# Altium PCB Animated Archer Rev1.PcbDoc
Units mm, origin at the board's own origin, x right, y up, seen from the top; angles counter-clockwise.
Board outline 152.4 x 101.6 mm, 4 copper layers (Top Layer, Internal Plane 1, Internal Plane 2, Bottom Layer), stack 0.778 mm thick; 159 components, 185 nets, 906 pads, 12 vias.
Unrouted connection lines stored in the file: 319.
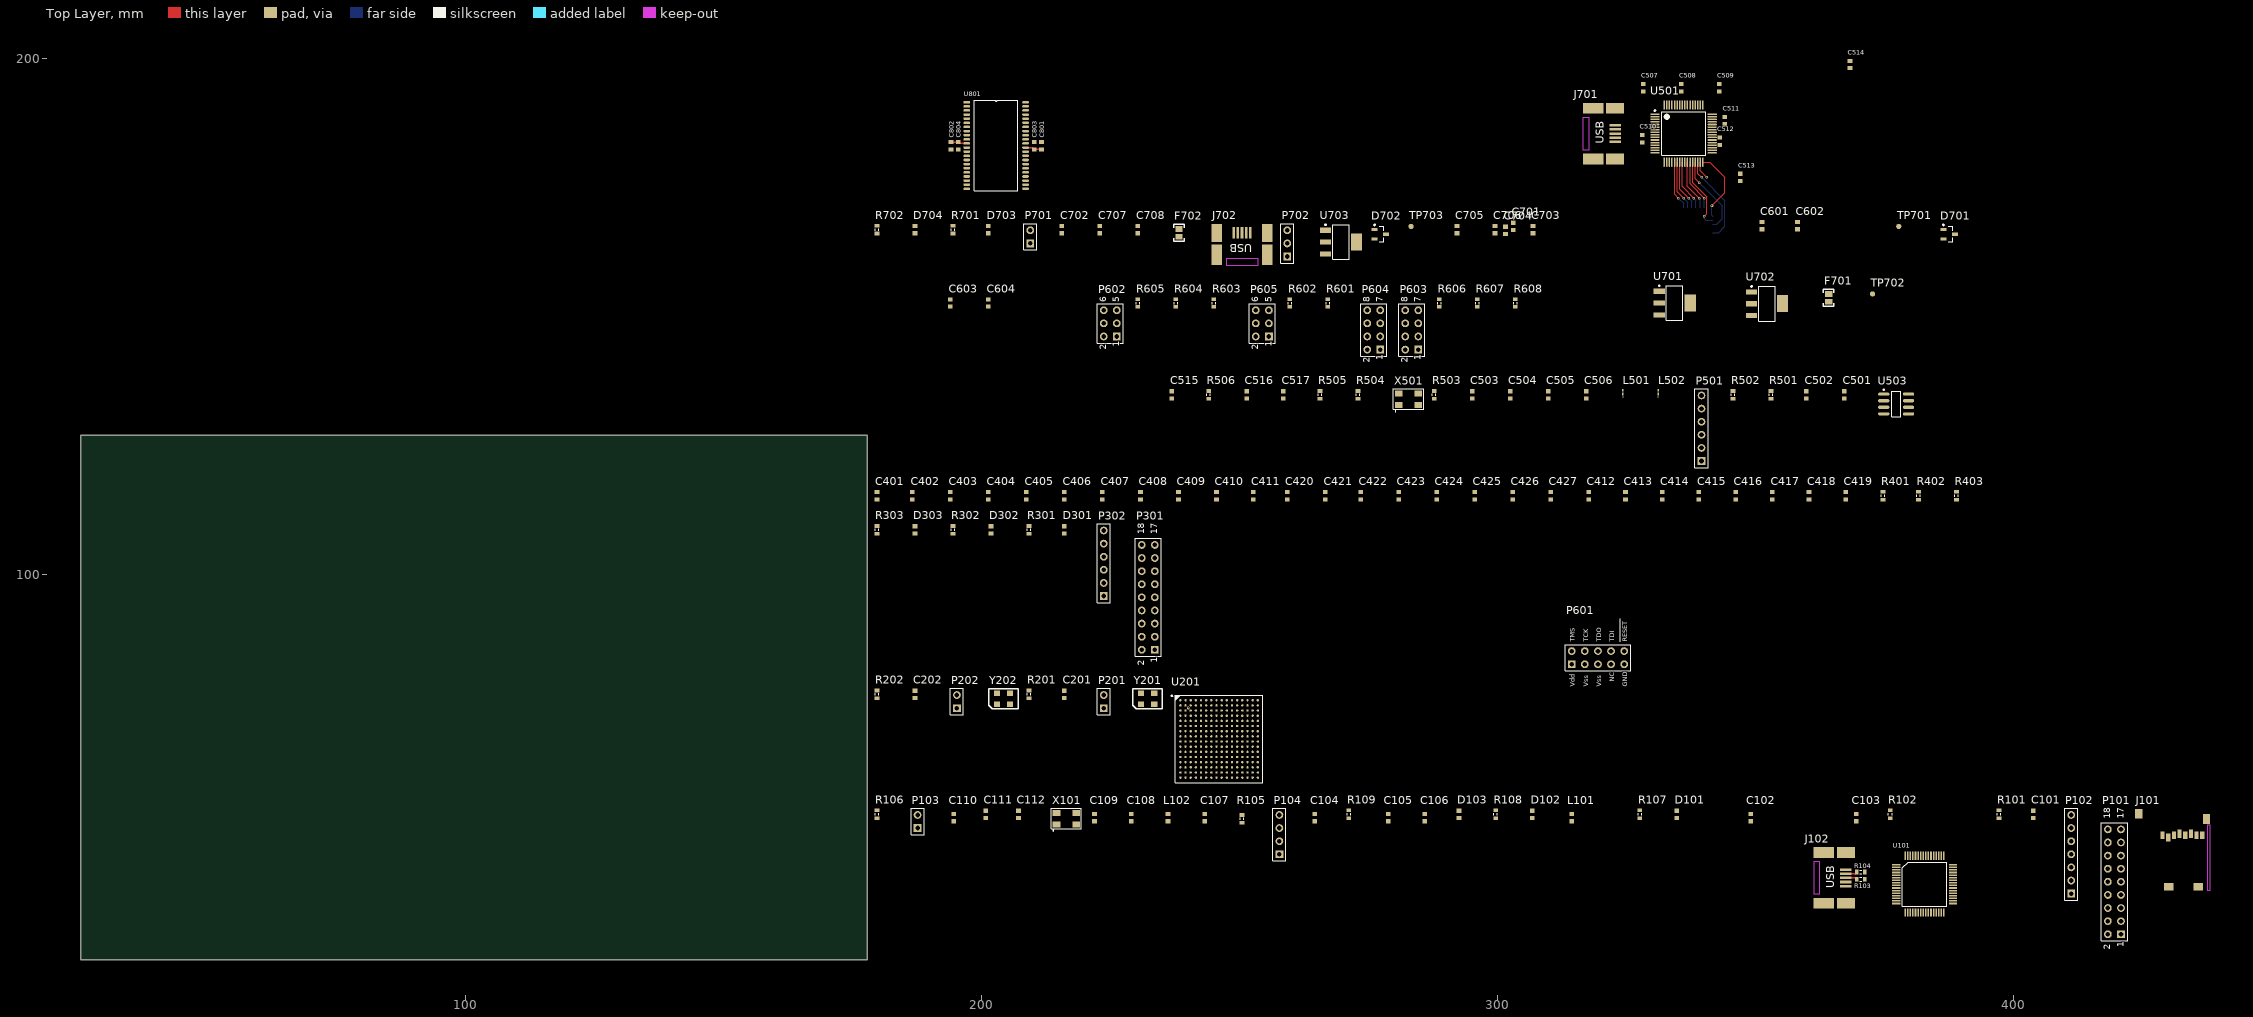
[diagram p0: Top Layer view]
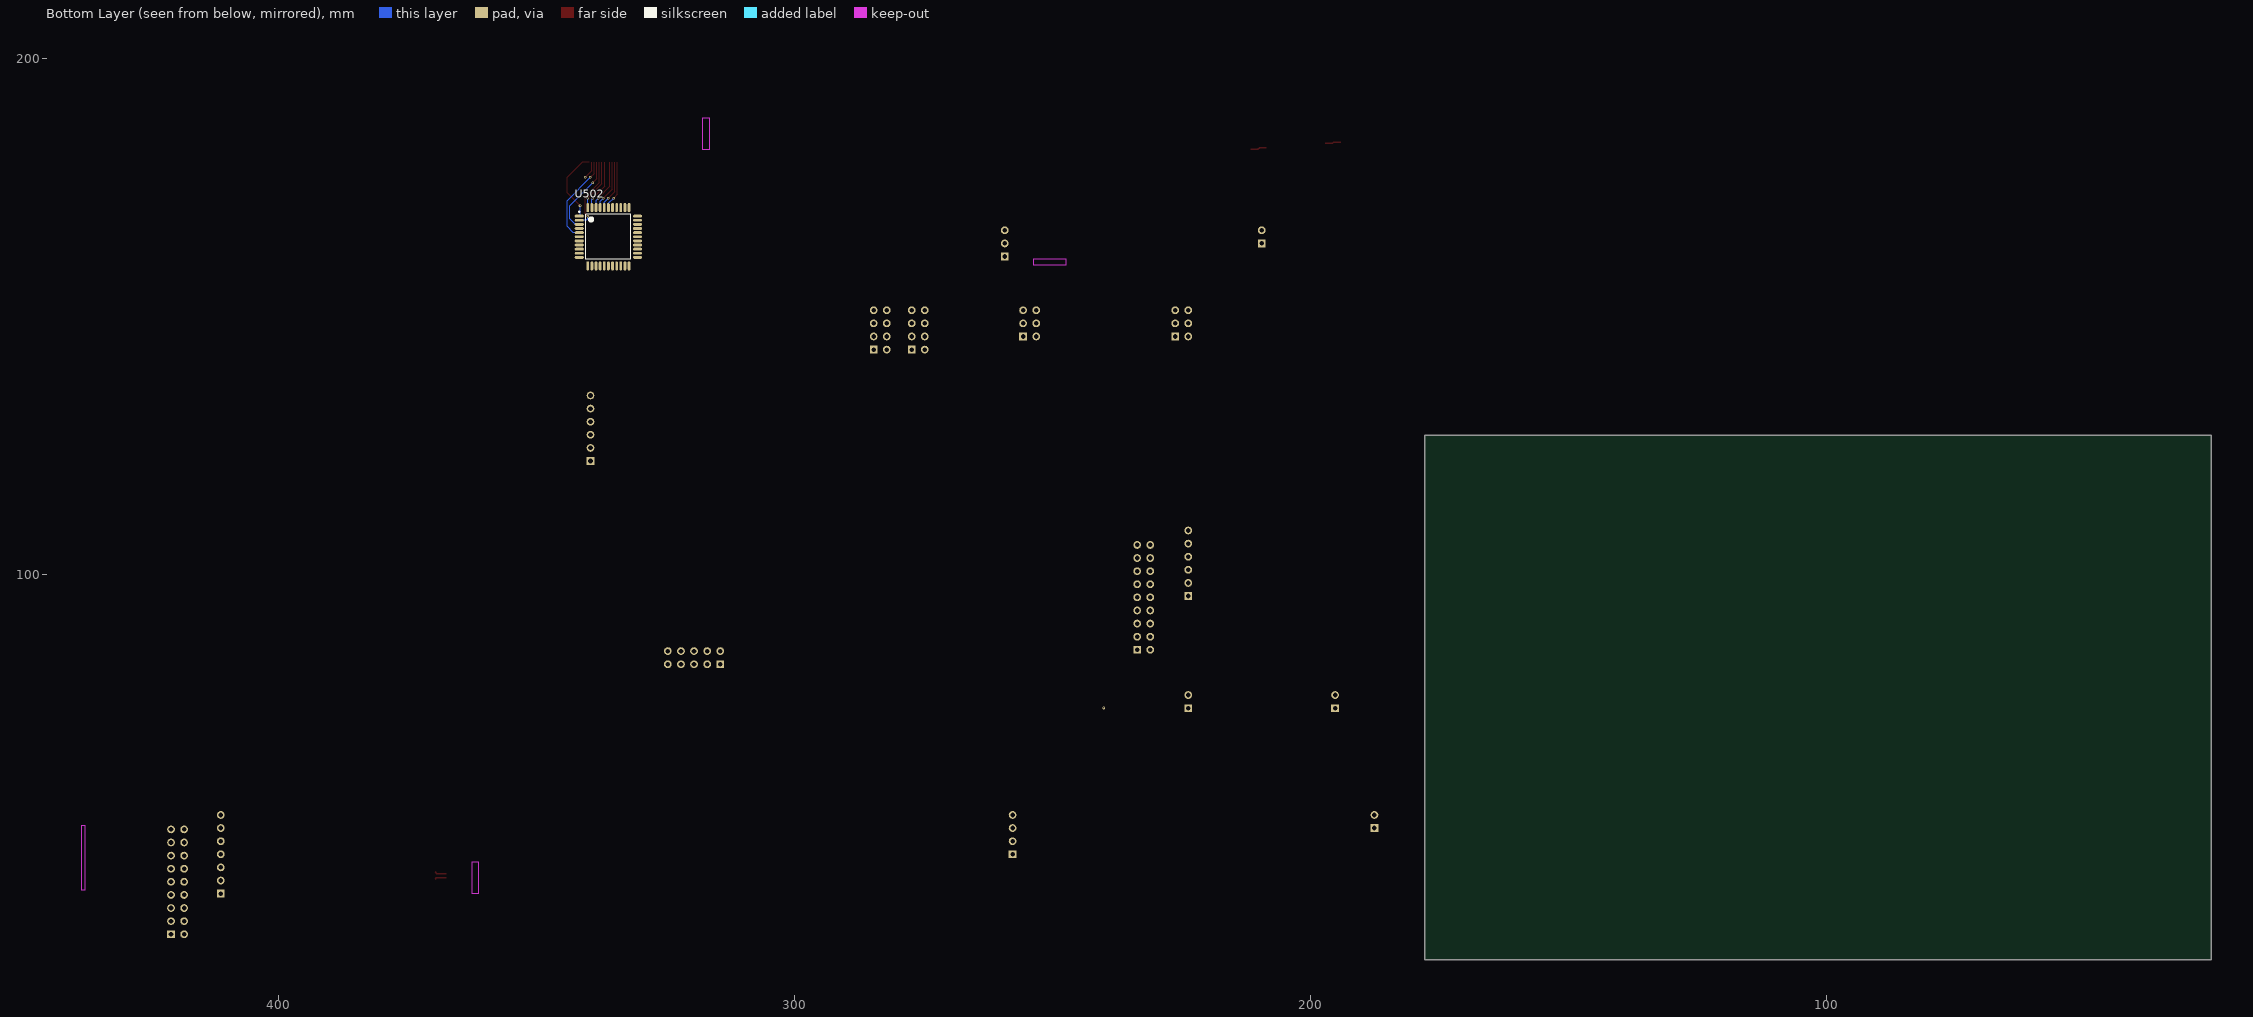
[diagram p1: Bottom Layer view, seen from below]
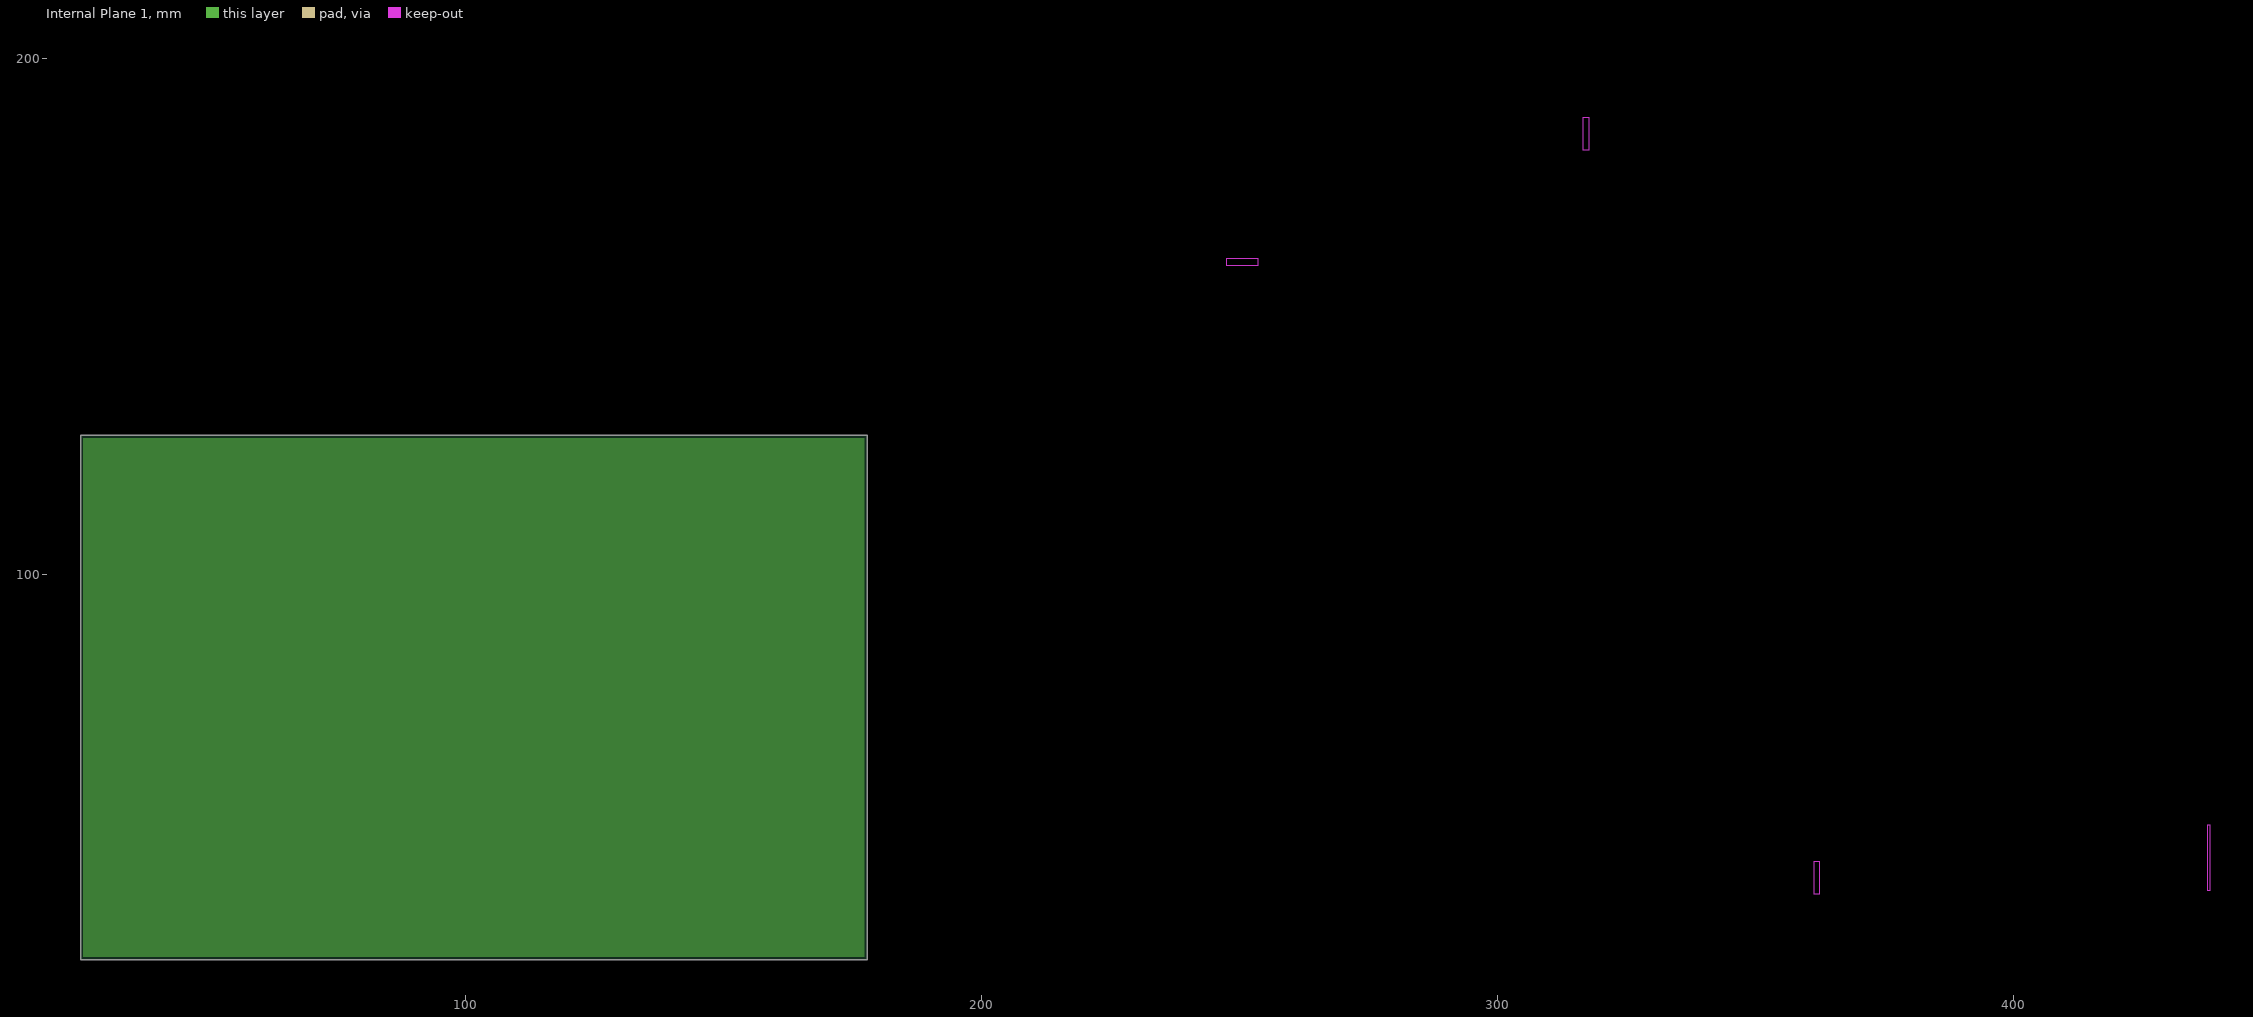
[diagram p2: Internal Plane 1, clearances drawn from the general rule]
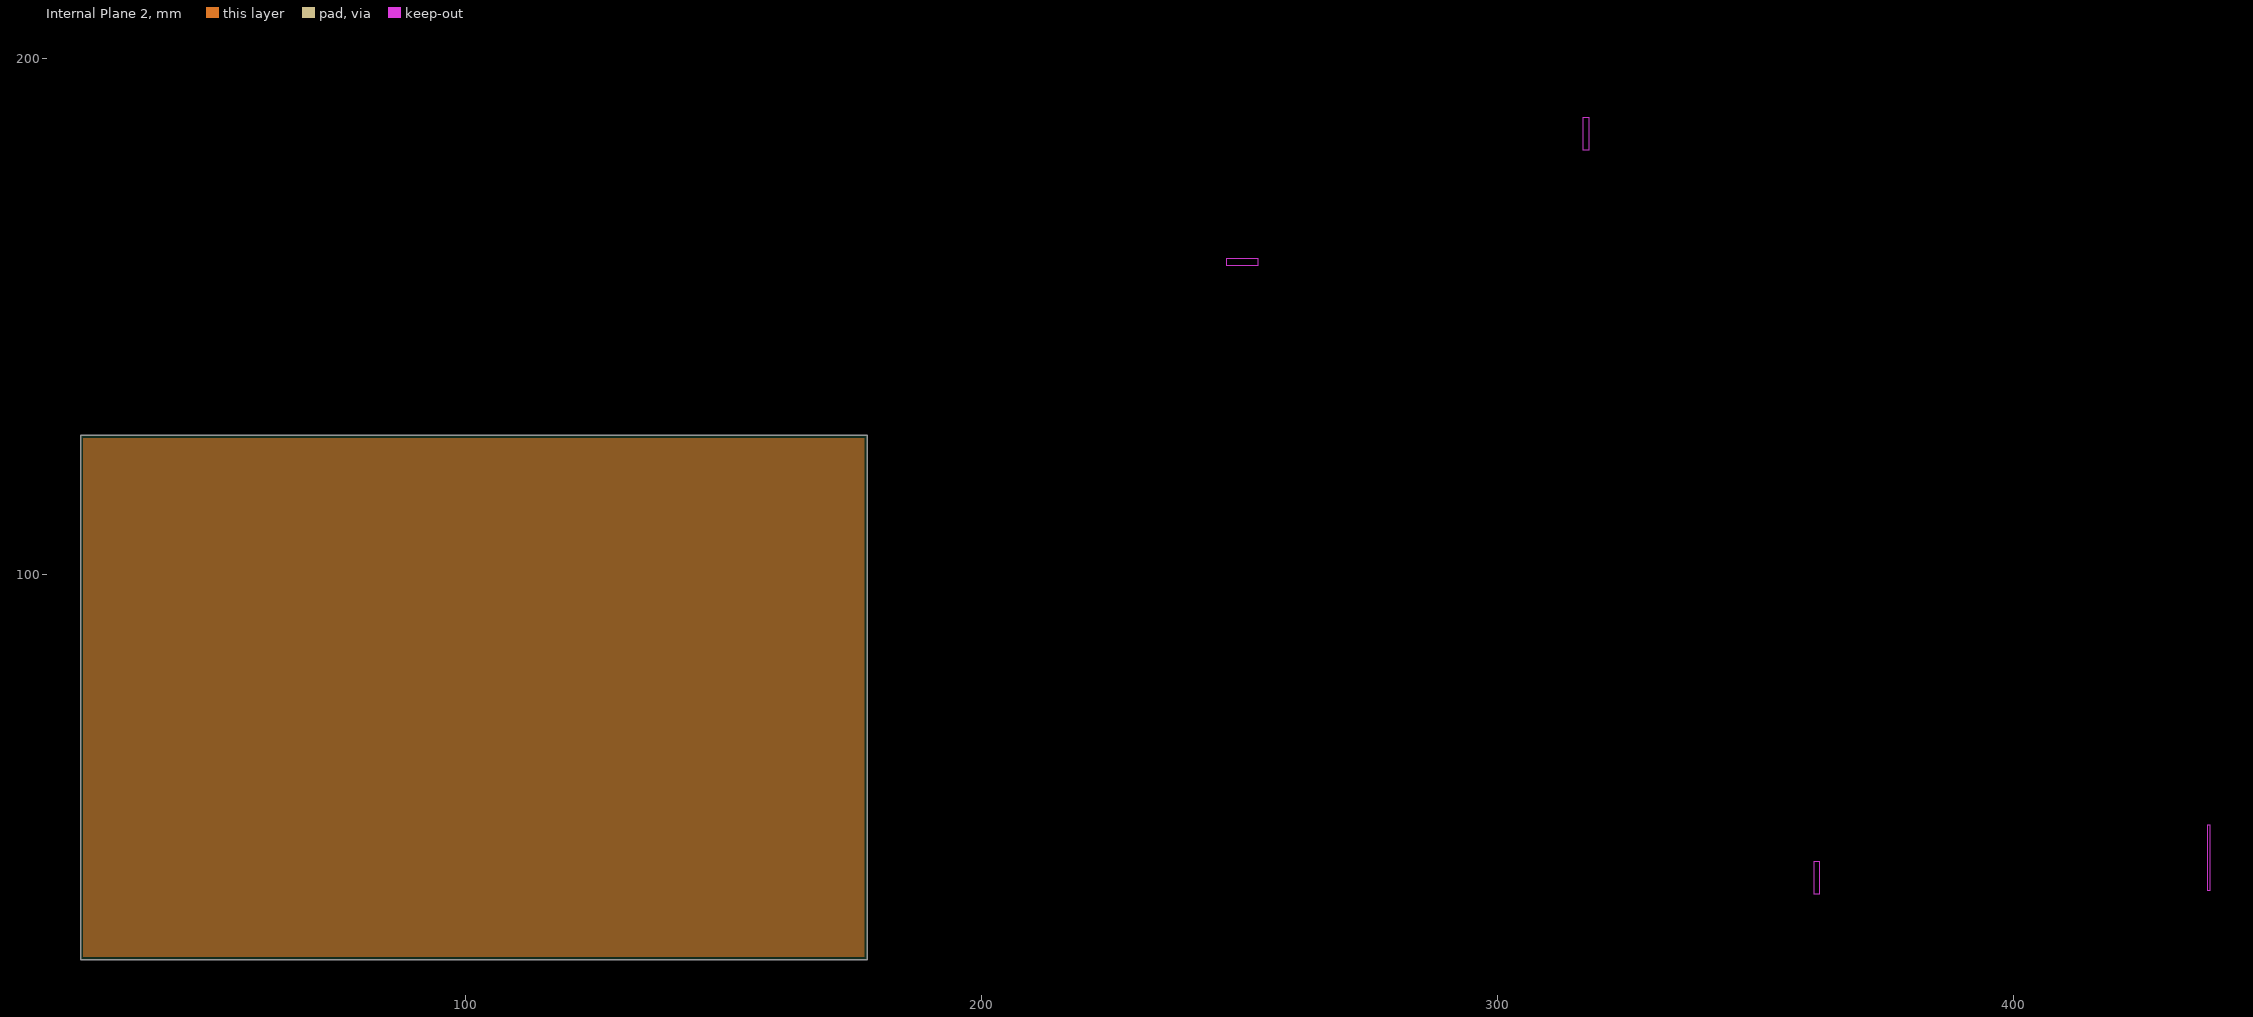
[diagram p3: Internal Plane 2, clearances drawn from the general rule]

## Layer stack, top to bottom
Top Solder: solder mask 0.0102, Solder Resist, Dk 3.5
Top Layer: signal copper 0.0356
Dielectric 1: core 0.254, FR-4, Dk 4.2
Internal Plane 1: plane copper 0.036
Dielectric 3: prepreg 0.127, Dk 4.2
Internal Plane 2: plane copper 0.036
Dielectric 2: core 0.254, Dk 4.2
Bottom Layer: signal copper 0.0356
Bottom Solder: solder mask 0.0102, Solder Resist, Dk 3.5

## Board outline
25.4,25.4 177.8,25.4 177.8,127 25.4,127

## Design rules (kind name [scope] priority, off if disabled: settings)
Clearance [All] p1: gap=0.152
HoleSize [All] p1: absolutevalues=TRUE maxlimit=6.35 minlimit=0.3 maxpercent=80.000 minpercent=20.000
MinimumSolderMaskSliver [All] p1: minsoldermaskwidth=0.1
PlaneClearance [All] p1: clearance=0.508
PlaneConnect [All] p1: planeconnectstyle=Relief reliefexpansion=0.508 reliefentries=4 reliefconductorwidth=0.254 reliefairgap=0.254
PolygonConnect [All] p1: connectstyle=Relief reliefconductorwidth=0.254 reliefentries=4 polygonreliefangle="90 Angle" airgapwidth=0.254
RoomDefinition "Animated Archer Rev1" [All] p1: confinementstyle=ConfineIn formatcopy=TRUE lockcomponents=FALSE outline 28,22.352 28,211.709 455.041,211.709 455.041,22.352
RoutingVias [All] p1: holewidth=0.3 width=0.5 viastyle="Through Hole" minholewidth=0.3 minwidth=0.5 maxholewidth=0.5 maxwidth=1
SilkToSolderMaskClearance SilkscreenOverComponentPads [IsPad] p1: minsilkscreentomaskgap=0.18 clearancetoexposedcopper=TRUE
SolderMaskExpansion [All] p1: expansion=0.1
Width [All] p1: maxlimit=0.3 minlimit=0.152 preferedwidth=0.2 checkconnectedcopper=TRUE
24 further rules are at their usual default settings.

## Classes and differential pairs
component class ARM: C101 C102 C103 C104 C105 C106 C107 C108 C109 C110 C111 C112 D101 D102 D103 J101 J102 L101 L102 P101 P102 P103 P104 R101 R102 R103 R104 R105 R106 R107 R108 R109 U101 X101
component class FPGA1: C201 C202 P201 P202 R201 R202 U201 Y201 Y202
component class FPGA3: C401 C402 C403 C404 C405 C406 C407 C408 C409 C410 C411 C412 C413 C414 C415 C416 C417 C418 C419 C420 C421 C422 C423 C424 C425 C426 C427 R401 R402 R403
component class JTAG1: C501 C502 C503 C504 C505 C506 C507 C508 C509 C510 C511 C512 C513 C514 C515 C516 C517 L501 L502 P501 R501 R502 R503 R504 R505 R506 U501 U503 X501
component class JTAG2: C601 C602 C603 C604 P601 P602 P603 P604 P605 R601 R602 R603 R604 R605 R606 R607 R608 U502
component class POWER: C701 C702 C703 C704 C705 C706 C707 C708 D701 D702 D703 D704 F701 F702 J701 J702 P701 P702 R701 R702 TP701 TP702 TP703 U701 U702 U703
component class SRAM: C801 C802 C803 C804 U801
net class SRAM_ADDR[18..0]: SRAM_ADDR0 SRAM_ADDR1 SRAM_ADDR2 SRAM_ADDR3 SRAM_ADDR4 SRAM_ADDR5 SRAM_ADDR6 SRAM_ADDR7 SRAM_ADDR8 SRAM_ADDR9 SRAM_ADDR10 SRAM_ADDR11 SRAM_ADDR12 SRAM_ADDR13 SRAM_ADDR14 SRAM_ADDR15 SRAM_ADDR16 SRAM_ADDR17 SRAM_ADDR18
net class SRAM_DATA[7..0]: SRAM_DATA0 SRAM_DATA1 SRAM_DATA2 SRAM_DATA3 SRAM_DATA4 SRAM_DATA5 SRAM_DATA6 SRAM_DATA7
component class FPGA2: D301 D302 D303 P301 P302 R301 R302 R303

## Components (designator, comment, footprint, x,y, rotation, side; value= is the part's Value field where it differs from the comment)
C101 "0.1uF" 1608[0603] 403.733,53.594 r90 top
C102 "Cap Semi" 1608[0603] 348.996,52.959 r90 top
C103 "Cap Semi" 1608[0603] 369.443,52.959 r90 top
C104 "Cap Semi" 1608[0603] 264.541,52.959 r90 top
C105 "Cap Semi" 1608[0603] 278.765,52.959 r90 top
C106 "Cap Semi" 1608[0603] 285.877,52.959 r90 top
C107 "Cap Semi" 1608[0603] 243.205,52.959 r90 top
C108 "Cap Semi" 1608[0603] 228.981,52.959 r90 top
C109 "Cap Semi" 1608[0603] 221.869,52.959 r90 top
C110 "Cap Semi" 1608[0603] 194.564,52.959 r90 top
C111 "0.1uF" 1608[0603] 200.787,53.594 r90 top
C112 "0.1uF" 1608[0603] 207.137,53.594 r90 top
C201 "Cap Semi" 1608[0603] 216.027,76.835 r90 top
C202 "Cap Semi" 1608[0603] 187.071,76.835 r90 top
C401 "0.1uF" 1608[0603] 179.705,115.316 r90 top
C402 "0.1uF" 1608[0603] 186.563,115.316 r90 top
C403 "0.1uF" 1608[0603] 193.929,115.316 r90 top
C404 "0.1uF" 1608[0603] 201.295,115.316 r90 top
C405 "0.1uF" 1608[0603] 208.661,115.316 r90 top
C406 "0.1uF" 1608[0603] 216.027,115.316 r90 top
C407 "0.1uF" 1608[0603] 223.393,115.316 r90 top
C408 "0.1uF" 1608[0603] 230.759,115.316 r90 top
C409 "0.1uF" 1608[0603] 238.125,115.316 r90 top
C410 "0.1uF" 1608[0603] 245.491,115.316 r90 top
C411 "0.1uF" 1608[0603] 252.603,115.316 r90 top
C412 "0.1uF" 1608[0603] 317.627,115.316 r90 top
C413 "0.1uF" 1608[0603] 324.739,115.316 r90 top
C414 "0.1uF" 1608[0603] 331.851,115.316 r90 top
C415 "0.1uF" 1608[0603] 338.963,115.316 r90 top
C416 "0.1uF" 1608[0603] 346.075,115.316 r90 top
C417 "0.1uF" 1608[0603] 353.187,115.316 r90 top
C418 "0.1uF" 1608[0603] 360.299,115.316 r90 top
C419 "0.1uF" 1608[0603] 367.411,115.316 r90 top
C420 "0.1uF" 1608[0603] 259.207,115.316 r90 top
C421 "0.1uF" 1608[0603] 266.573,115.316 r90 top
C422 "0.1uF" 1608[0603] 273.431,115.316 r90 top
C423 "0.1uF" 1608[0603] 280.797,115.316 r90 top
C424 "0.1uF" 1608[0603] 288.163,115.316 r90 top
C425 "0.1uF" 1608[0603] 295.529,115.316 r90 top
C426 "0.1uF" 1608[0603] 302.895,115.316 r90 top
C427 "0.1uF" 1608[0603] 310.261,115.316 r90 top
C501 "0.1uF" 1608[0603] 367.157,134.874 r90 top
C502 "0.1uF" 1608[0603] 359.791,134.874 r90 top
C503 "0.1uF" 1608[0603] 295.021,134.874 r90 top
C504 "0.1uF" 1608[0603] 302.387,134.874 r90 top
C505 "0.1uF" 1608[0603] 309.753,134.874 r90 top
C506 "0.1uF" 1608[0603] 317.119,134.874 r90 top
C507 "0.1uF" 1608[0603] 328.205,194.374 r90 top
C508 "0.1uF" 1608[0603] 335.571,194.374 r90 top
C509 "0.1uF" 1608[0603] 342.937,194.374 r90 top
C510 "0.1uF" 1608[0603] 328,184.5 r90 top
C511 "0.1uF" 1608[0603] 344,188 r90 top
C512 "0.1uF" 1608[0603] 343,184 r90 top
C513 "0.1uF" 1608[0603] 347,177 r90 top
C514 "0.1uF" 1608[0603] 368.243,198.874 r90 top
C515 "0.1uF" 1608[0603] 236.855,134.874 r90 top
C516 "0.1uF" 1608[0603] 251.333,134.874 r90 top
C517 "0.1uF" 1608[0603] 258.445,134.874 r90 top
C601 "0.1uF" 1608[0603] 351.205,167.654 r90 top
C602 "0.1uF" 1608[0603] 358.063,167.654 r90 top
C603 "0.1uF" 1608[0603] 193.929,152.654 r90 top
C604 "0.1uF" 1608[0603] 201.295,152.654 r90 top
C701 "Cap Semi" 1608[0603] 303.022,167.513 r90 top
C702 "Cap Semi" 1608[0603] 215.519,166.878 r90 top
C703 "0.1uF" 1608[0603] 306.832,166.878 r90 top
C704 "0.1uF" 1608[0603] 301.498,166.751 r90 top
C705 "0.1uF" 1608[0603] 292.1,166.878 r90 top
C706 "0.1uF" 1608[0603] 299.466,166.878 r90 top
C707 "0.1uF" 1608[0603] 222.885,166.878 r90 top
C708 "0.1uF" 1608[0603] 230.251,166.878 r90 top
C801 "0.1uF" 1608[0603] 211.582,183.134 r270 top
C802 "0.1uF" 1608[0603] 194.056,183.134 r90 top
C803 "0.1uF" 1608[0603] 210.185,183.134 r270 top
C804 "0.1uF" 1608[0603] 195.453,183.134 r90 top
D101 "Green" 1608[0603] 334.645,53.594 r90 top
D102 "Green" 1608[0603] 306.705,53.594 r90 top
D103 "Green" 1608[0603] 292.481,53.594 r90 top
D301 "Green" 1608[0603] 216.027,108.712 r90 top
D302 "Green" 1608[0603] 201.803,108.712 r90 top
D303 "Green" 1608[0603] 187.071,108.712 r90 top
D701 "HSMS-2804-BLKG" SOT-23_N 387.477,165.989 r0 top
D702 "HSMS-2804-BLKG" SOT-23_N 277.241,165.989 r0 top
D703 "Green" 1608[0603] 201.295,166.878 r90 top
D704 "Green" 1608[0603] 187.071,166.878 r90 top
F701 "500mA" C0805 364.109,153.67 r90 top
F702 "500mA" C0805 238.252,166.243 r90 top
J101 "microSD" 500873-0806 438.023,38.862 r0 top
J102 "USB Mini-B" 54819-0572 361.188,41.275 r270 top
J701 "USB Mini-B" 54819-0572 316.5,185.5 r270 top
J702 "USB Mini-B" 54819-0572 250.444,160.02 r0 top
L101 "Ferrite" 1608[0603] 314.325,52.959 r90 top
L102 "Ferrite" 1608[0603] 236.093,52.959 r90 top
L501 "Ferrite Bead" 0603 324.231,135.382 r90 top
L502 "Ferrite Bead" 0603 331.089,135.382 r90 top
P101 "ARM GPIO" HDR2X9 420.751,30.353 r90 top
P102 "Header 7" HDR1X7 411.099,38.227 r90 top
P103 "EZPORT" HDR1X2 187.579,50.927 r90 top
P104 "I2C" HDR1X4 257.683,45.847 r90 top
P201 "Clk Enable" HDR1X2 223.647,74.168 r90 top
P202 "Clk Enable" HDR1X2 195.199,74.168 r90 top
P301 "FPGA GPIO" HDR2X9 233.553,85.471 r90 top
P302 "Motor Driver" HDR1X6 223.647,95.885 r90 top
P501 "CPLD_JTAG" HDR1X6 339.471,122.047 r90 top
P601 "JTAG" EZPORT 314.325,82.677 r0 top
P602 "ARM<=>FPGA" HDR2X3 226.187,146.177 r90 top
P603 "On-Board JTAG" HDR2X4 284.607,143.637 r90 top
P604 "ARM JTAG" HDR2X4 277.241,143.637 r90 top
P605 "FPGA JTAG" HDR2X3 255.651,146.177 r90 top
P701 "Ex. Power" HDR1X2 209.423,164.211 r90 top
P702 "Source Sel" HDR1X3 259.207,161.671 r90 top
R101 "Res3" J1-0603 397.129,53.594 r90 top
R102 "Res3" J1-0603 376.047,53.594 r90 top
R103 "Res3" J1-0603 370.332,41.021 r0 top
R104 "Res3" J1-0603 370.332,42.418 r0 top
R105 "Res3" J1-0603 250.444,52.705 r90 top
R106 "Res3" J1-0603 179.705,53.594 r90 top
R107 "Res3" J1-0603 327.533,53.594 r90 top
R108 "Res3" J1-0603 299.593,53.594 r90 top
R109 "Res3" J1-0603 271.145,53.594 r90 top
R201 "Res3" J1-0603 209.169,76.835 r90 top
R202 "Res3" J1-0603 179.705,76.835 r90 top
R301 "Res3" J1-0603 209.169,108.712 r90 top
R302 "Res3" J1-0603 194.437,108.712 r90 top
R303 "Res3" J1-0603 179.705,108.712 r90 top
R401 "Res3" J1-0603 374.65,115.316 r90 top
R402 "Res3" J1-0603 381.508,115.316 r90 top
R403 "Res3" J1-0603 388.874,115.316 r90 top
R501 "Res3" J1-0603 352.933,134.874 r90 top
R502 "Res3" J1-0603 345.567,134.874 r90 top
R503 "Res3" J1-0603 287.655,134.874 r90 top
R504 "Res3" J1-0603 272.923,134.874 r90 top
R505 "Res3" J1-0603 265.557,134.874 r90 top
R506 "Res3" J1-0603 243.967,134.874 r90 top
R601 "Res3" J1-0603 267.081,152.654 r90 top
R602 "Res3" J1-0603 259.715,152.654 r90 top
R603 "Res3" J1-0603 244.983,152.654 r90 top
R604 "Res3" J1-0603 237.617,152.654 r90 top
R605 "Res3" J1-0603 230.251,152.654 r90 top
R606 "Res3" J1-0603 288.671,152.654 r90 top
R607 "Res3" J1-0603 296.037,152.654 r90 top
R608 "Res3" J1-0603 303.403,152.654 r90 top
R701 "Res3" J1-0603 194.437,166.878 r90 top
R702 "Res3" J1-0603 179.705,166.878 r90 top
TP701 "Test Point" TESTPT 377.698,167.513 r90 top
TP702 "Test Point" TESTPT 372.618,154.432 r90 top
TP703 "Test Point" TESTPT 283.21,167.513 r90 top
U101 "MK20DX128VLH5" MK20DX256VLH7 377.19,43.815 r0 top
U201 "XC6SLX25-2FTG256C" FTG256 245.999,68.199 r0 top
U501 "FT2232HL" LQFP-64_N 336,185.5 r0 top
U502 "XC2C32A-6VQG44C" VQG44_N 336,165.5 r180 bottom
U503 "93LC46B-I/SN" SOIC-SN8_N 377.19,133.096 r0 top
U701 "MCP1826S-3302E/DB" SOT-223-DB3_N 334.264,152.654 r0 top
U702 "MCP1826S-3302E/DB" SOT-223-DB3_N 352.171,152.527 r0 top
U703 "MCP1826S-1202E/DB" SOT-223-DB3_N 269.621,164.465 r0 top
U801 "IDT71V424" IDT-TSOP-44 197.104,191.581 r0 top
X101 "12MHz" CTS405XTAL 214.503,53.848 r0 top
X501 "12MHz" CTS405XTAL 280.797,135.128 r0 top
Y201 "12MHz" ASFLMB 230.886,74.93 r0 top
Y202 "100MHz" ASFLMB 202.946,74.93 r0 top

## Footprints (in the part's own frame and the unit in brackets; to place one, negate y for a bottom-side part, rotate by r counter-clockwise, add the part's x,y. Pads: shape width x height; smd on the part's side, far side on the other; paste and mask are expansions set on the pad)
0603 [mm] "Chip Inductor, Body 0.6x0.3mm, IPC High Density"
  rect 0.5x0.3 smd: 1(-0.35,0) 2(0.35,0)
  silkscreen extent -0.9,-0.05 -0.9,0.05, body extent -0.33,-0.18 0.33,0.18, height 0.55
1608[0603] [mm] "Chip Capacitor, Body 1.6x0.8mm, IPC High Density"
  rect 0.8x0.9 smd: 1(-0.7,0) 2(0.7,0)
  body extent -0.87,-0.48 0.87,0.48, height 1.3
54819-0572 [mm] "USB Mini-B Connector"
  rect 0.5x2.25 smd: 1(-1.6,6.25) 2(-0.8,6.25) 3(0,6.25) 4(0.8,6.25) 5(1.6,6.25)
  rect 2.05x3.5 smd: 6(-4.925,6.25) 6(4.925,6.25)
  rect 2.05x4 smd: 6(-4.925,2) 6(4.925,2)
  Keep-Out Layer region: -3.1,0 3.1,0 3.1,1.2 -3.1,1.2
  body extent -4.95,-2 4.95,7, height 4.05
500873-0806 [mm] "microSD Memory Card Connector"
  rect 0.8x1.5 smd: 1(-8.115,10.25) 2(-7.015,10.65) 5(-4.815,10.65) 7(-2.615,10.65) 8(-1.515,10.65) 9(-9.215,10.65)
  rect 0.8x1.7 smd: 4(-5.915,10.95) 6(-3.715,10.95)
  rect 1.4x1.9 smd: 6(-13.85,14.85) 6(-0.7,13.85)
  rect 1.8x1.4 smd: 6(-8,0.7) 6(-2.3,0.7)
  Keep-Out Layer region: -0.6,0 0,0 0,12.64 -0.6,12.64
  body extent -14.24,0.1 -0.24,15.3, height 1.78
ASFLMB [mm] "ASFLMB Clock Oscillator"
  rect 1.2x1.1 smd: 1(0,0) 2(2.54,0) 3(2.54,2.1) 4(0,2.1)
  silkscreen extent -1.6,-0.9 4.1,3
C0805 [mm] "Chip Capacitor, Body 2.0x1.3mm, IPC High Density"
  rect 1.1x1.4 smd: 1(-0.75,0) 2(0.75,0)
  silkscreen extent -1.65,-1.02 1.65,1.02, body extent -1.1,-0.72 1.1,0.72, height 1.4
CTS405XTAL [mm] "Standard 5.0mm x 3.2mm Ceramic Surface Mount Package"
  rect 1.5x1.2 smd: 1(0,-2.2) 2(3.8,-2.2) 3(3.8,0) 4(0,0)
  silkscreen extent -1.02,-3.51 4.83,0.89
EZPORT [mm] "Connector; Header; 5x2 Position"
  rect 1.5x1.5 hole 0.9: 1(0,0)
  round 1.5 hole 0.9: 2(0,2.54) 3(2.54,0) 4(2.54,2.54) 5(5.08,0) 6(5.08,2.54) 7(7.62,0) 8(7.62,2.54) 9(10.16,0) 10(10.16,2.54)
  silkscreen extent -1.27,-1.27 11.43,8.76
FTG256 [mm] "BGA, 256-Leads, Body 17x17mm, Pitch 1mm"
  round 0.45 smd: A1(-7.5,7.5) A2(-6.5,7.5) A3(-5.5,7.5) A4(-4.5,7.5) A5(-3.5,7.5) A6(-2.5,7.5) A7(-1.5,7.5) A8(-0.5,7.5) A9(0.5,7.5) A10(1.5,7.5) A11(2.5,7.5) A12(3.5,7.5) A13(4.5,7.5) A14(5.5,7.5) A15(6.5,7.5) A16(7.5,7.5) B1(-7.5,6.5) B2(-6.5,6.5) B3(-5.5,6.5) B4(-4.5,6.5) B5(-3.5,6.5) B6(-2.5,6.5) B7(-1.5,6.5) B8(-0.5,6.5) B9(0.5,6.5) B10(1.5,6.5) B11(2.5,6.5) B12(3.5,6.5) B13(4.5,6.5) B14(5.5,6.5) B15(6.5,6.5) B16(7.5,6.5) C1(-7.5,5.5) C2(-6.5,5.5) C3(-5.5,5.5) C4(-4.5,5.5) C5(-3.5,5.5) C6(-2.5,5.5) C7(-1.5,5.5) C8(-0.5,5.5) C9(0.5,5.5) C10(1.5,5.5) C11(2.5,5.5) C12(3.5,5.5) C13(4.5,5.5) C14(5.5,5.5) C15(6.5,5.5) C16(7.5,5.5) D1(-7.5,4.5) D2(-6.5,4.5) D3(-5.5,4.5) D4(-4.5,4.5) D5(-3.5,4.5) D6(-2.5,4.5) D7(-1.5,4.5) D8(-0.5,4.5) D9(0.5,4.5) D10(1.5,4.5) D11(2.5,4.5) D12(3.5,4.5) D13(4.5,4.5) D14(5.5,4.5) D15(6.5,4.5) D16(7.5,4.5) E1(-7.5,3.5) E2(-6.5,3.5) E3(-5.5,3.5) E4(-4.5,3.5) E5(-3.5,3.5) E6(-2.5,3.5) E7(-1.5,3.5) E8(-0.5,3.5) E9(0.5,3.5) E10(1.5,3.5) E11(2.5,3.5) E12(3.5,3.5) E13(4.5,3.5) E14(5.5,3.5) E15(6.5,3.5) E16(7.5,3.5) F1(-7.5,2.5) F2(-6.5,2.5) F3(-5.5,2.5) F4(-4.5,2.5) F5(-3.5,2.5) F6(-2.5,2.5) F7(-1.5,2.5) F8(-0.5,2.5) F9(0.5,2.5) F10(1.5,2.5) F11(2.5,2.5) F12(3.5,2.5) F13(4.5,2.5) F14(5.5,2.5) F15(6.5,2.5) F16(7.5,2.5) G1(-7.5,1.5) G2(-6.5,1.5) G3(-5.5,1.5) G4(-4.5,1.5) G5(-3.5,1.5) G6(-2.5,1.5) G7(-1.5,1.5) G8(-0.5,1.5) G9(0.5,1.5) G10(1.5,1.5) G11(2.5,1.5) G12(3.5,1.5) G13(4.5,1.5) G14(5.5,1.5) G15(6.5,1.5) G16(7.5,1.5) H1(-7.5,0.5) H2(-6.5,0.5) H3(-5.5,0.5) H4(-4.5,0.5) H5(-3.5,0.5) H6(-2.5,0.5) H7(-1.5,0.5) H8(-0.5,0.5) H9(0.5,0.5) H10(1.5,0.5) H11(2.5,0.5) H12(3.5,0.5) H13(4.5,0.5) H14(5.5,0.5) H15(6.5,0.5) H16(7.5,0.5) J1(-7.5,-0.5) J2(-6.5,-0.5) J3(-5.5,-0.5) J4(-4.5,-0.5) J5(-3.5,-0.5) J6(-2.5,-0.5) J7(-1.5,-0.5) J8(-0.5,-0.5) J9(0.5,-0.5) J10(1.5,-0.5) J11(2.5,-0.5) J12(3.5,-0.5) J13(4.5,-0.5) J14(5.5,-0.5) J15(6.5,-0.5) J16(7.5,-0.5) K1(-7.5,-1.5) K2(-6.5,-1.5) K3(-5.5,-1.5) K4(-4.5,-1.5) K5(-3.5,-1.5) K6(-2.5,-1.5) K7(-1.5,-1.5) K8(-0.5,-1.5) K9(0.5,-1.5) K10(1.5,-1.5) K11(2.5,-1.5) K12(3.5,-1.5) K13(4.5,-1.5) K14(5.5,-1.5) K15(6.5,-1.5) K16(7.5,-1.5) L1(-7.5,-2.5) L2(-6.5,-2.5) L3(-5.5,-2.5) L4(-4.5,-2.5) L5(-3.5,-2.5) L6(-2.5,-2.5) L7(-1.5,-2.5) L8(-0.5,-2.5) L9(0.5,-2.5) L10(1.5,-2.5) L11(2.5,-2.5) L12(3.5,-2.5) L13(4.5,-2.5) L14(5.5,-2.5) L15(6.5,-2.5) L16(7.5,-2.5) M1(-7.5,-3.5) M2(-6.5,-3.5) M3(-5.5,-3.5) M4(-4.5,-3.5) M5(-3.5,-3.5) M6(-2.5,-3.5) M7(-1.5,-3.5) M8(-0.5,-3.5) M9(0.5,-3.5) M10(1.5,-3.5) M11(2.5,-3.5) M12(3.5,-3.5) M13(4.5,-3.5) M14(5.5,-3.5) M15(6.5,-3.5) M16(7.5,-3.5) N1(-7.5,-4.5) N2(-6.5,-4.5) N3(-5.5,-4.5) N4(-4.5,-4.5) N5(-3.5,-4.5) N6(-2.5,-4.5) N7(-1.5,-4.5) N8(-0.5,-4.5) N9(0.5,-4.5) N10(1.5,-4.5) N11(2.5,-4.5) N12(3.5,-4.5) N13(4.5,-4.5) N14(5.5,-4.5) N15(6.5,-4.5) N16(7.5,-4.5) P1(-7.5,-5.5) P2(-6.5,-5.5) P3(-5.5,-5.5) P4(-4.5,-5.5) P5(-3.5,-5.5) P6(-2.5,-5.5) P7(-1.5,-5.5) P8(-0.5,-5.5) P9(0.5,-5.5) P10(1.5,-5.5) P11(2.5,-5.5) P12(3.5,-5.5) P13(4.5,-5.5) P14(5.5,-5.5) P15(6.5,-5.5) P16(7.5,-5.5) R1(-7.5,-6.5) R2(-6.5,-6.5) R3(-5.5,-6.5) R4(-4.5,-6.5) R5(-3.5,-6.5) R6(-2.5,-6.5) R7(-1.5,-6.5) R8(-0.5,-6.5) R9(0.5,-6.5) R10(1.5,-6.5) R11(2.5,-6.5) R12(3.5,-6.5) R13(4.5,-6.5) R14(5.5,-6.5) R15(6.5,-6.5) R16(7.5,-6.5) T1(-7.5,-7.5) T2(-6.5,-7.5) T3(-5.5,-7.5) T4(-4.5,-7.5) T5(-3.5,-7.5) T6(-2.5,-7.5) T7(-1.5,-7.5) T8(-0.5,-7.5) T9(0.5,-7.5) T10(1.5,-7.5) T11(2.5,-7.5) T12(3.5,-7.5) T13(4.5,-7.5) T14(5.5,-7.5) T15(6.5,-7.5) T16(7.5,-7.5)
  silkscreen extent -9.27,-8.5 8.5,8.5, body extent -8.5,-8.5 8.5,8.5, height 1.55
HDR1X2 [mm] "Connector; Header; 2 Position"
  rect 1.5x1.5 hole 0.9: 1(0,0)
  round 1.5 hole 0.9: 2(2.54,0)
  silkscreen extent -1.27,-1.27 3.81,1.27
HDR1X3 [mm] "Connector; Header; 3 Position"
  rect 1.5x1.5 hole 0.9: 1(0,0)
  round 1.5 hole 0.9: 2(2.54,0) 3(5.08,0)
  silkscreen extent -1.27,-1.27 6.35,1.27
HDR1X4 [mm] "Connector; Header; 4 Position"
  rect 1.5x1.5 hole 0.9: 1(0,0)
  round 1.5 hole 0.9: 2(2.54,0) 3(5.08,0) 4(7.62,0)
  silkscreen extent -1.27,-1.27 8.89,1.27
HDR1X6 [mm] "Connector; Header; 6 Position"
  rect 1.5x1.5 hole 0.9: 1(0,0)
  round 1.5 hole 0.9: 2(2.54,0) 3(5.08,0) 4(7.62,0) 5(10.16,0) 6(12.7,0)
  silkscreen extent -1.27,-1.27 13.97,1.27
HDR1X7 [mm] "Connector; Header; 7 Position"
  rect 1.5x1.5 hole 0.9: 1(0,0)
  round 1.5 hole 0.9: 2(2.54,0) 3(5.08,0) 4(7.62,0) 5(10.16,0) 6(12.7,0) 7(15.24,0)
  silkscreen extent -1.27,-1.27 16.51,1.27
HDR2X3 [mm] "Connector; Header; 3x2 Position"
  rect 1.5x1.5 hole 0.9: 1(0,0)
  round 1.5 hole 0.9: 2(0,2.54) 3(2.54,0) 4(2.54,2.54) 5(5.08,0) 6(5.08,2.54)
  silkscreen extent -1.27,-1.27 6.35,3.81
HDR2X4 [mm] "Connector; Header; 4x2 Position"
  rect 1.5x1.5 hole 0.9: 1(0,0)
  round 1.5 hole 0.9: 2(0,2.54) 3(2.54,0) 4(2.54,2.54) 5(5.08,0) 6(5.08,2.54) 7(7.62,0) 8(7.62,2.54)
  silkscreen extent -1.27,-1.27 8.89,3.81
HDR2X9 [mm] "Connector; Header; 9x2 Position"
  rect 1.5x1.5 hole 0.9: 1(0,0)
  round 1.5 hole 0.9: 2(0,2.54) 3(2.54,0) 4(2.54,2.54) 5(5.08,0) 6(5.08,2.54) 7(7.62,0) 8(7.62,2.54) 9(10.16,0) 10(10.16,2.54) 11(12.7,0) 12(12.7,2.54) 13(15.24,0) 14(15.24,2.54) 15(17.78,0) 16(17.78,2.54) 17(20.32,0) 18(20.32,2.54)
  silkscreen extent -1.27,-1.27 21.59,3.81
IDT-TSOP-44 [mm] "IDT PH/PHG Package Outline TSOP Type II 44-pin"
  oval 1.3x0.5 smd: A0(0,-1.6) A1(0,-2.4) A2(0,-3.2) A3(0,-4) A4(0,-4.8) A5(0,-12) A6(0,-12.8) A7(0,-13.6) A8(0,-14.4) A9(0,-15.2) A10(11.4,-14.4) A11(11.4,-13.6) A12(11.4,-12.8) A13(11.4,-12) A14(11.4,-11.2) A15(11.4,-4.8) A16(11.4,-4) A17(11.4,-3.2) A18(11.4,-2.4) CS(0,-5.6) D0(0,-6.4) D1(0,-7.2) D2(0,-9.6) D3(0,-10.4) D4(11.4,-10.4) D5(11.4,-9.6) D6(11.4,-7.2) D7(11.4,-6.4) NC(0,-16.8) NC(0,-16) NC(0,-0.8) NC(11.4,-16.8) NC(11.4,-16) NC(11.4,-15.2) NC(11.4,-1.6) NC(11.4,-0.8) NC(11.4,0) OE(11.4,-5.6) VDD(0,-8) VDD(11.4,-8.8) VSS(0,-8.8) VSS(11.4,-8) WE(0,-11.2)
  rect 1.3x0.5 smd: NC(0,0)
  silkscreen extent 1.48,-17.2 9.92,0.4
J1-0603 [mm] "Chip Resistor, Body 1.6x0.8mm, IPC High Density"
  rect 0.7x0.9 smd: 1(-0.75,0) 2(0.75,0)
  silkscreen extent -0.2,-0.35 0.2,0.35, body extent -0.85,-0.48 0.85,0.48, height 0.9
LQFP-64_N [mm] "Thin QFP, 64-Leads, Body 10x10mm, Pitch 0.5mm, IPC Medium Density"
  oval 1.8x0.3 smd: 1(-5.55,3.75) 2(-5.55,3.25) 3(-5.55,2.75) 4(-5.55,2.25) 5(-5.55,1.75) 6(-5.55,1.25) 7(-5.55,0.75) 8(-5.55,0.25) 9(-5.55,-0.25) 10(-5.55,-0.75) 11(-5.55,-1.25) 12(-5.55,-1.75) 13(-5.55,-2.25) 14(-5.55,-2.75) 15(-5.55,-3.25) 16(-5.55,-3.75) 33(5.55,-3.75) 34(5.55,-3.25) 35(5.55,-2.75) 36(5.55,-2.25) 37(5.55,-1.75) 38(5.55,-1.25) 39(5.55,-0.75) 40(5.55,-0.25) 41(5.55,0.25) 42(5.55,0.75) 43(5.55,1.25) 44(5.55,1.75) 45(5.55,2.25) 46(5.55,2.75) 47(5.55,3.25) 48(5.55,3.75)
  oval 0.3x1.8 smd: 17(-3.75,-5.55) 18(-3.25,-5.55) 19(-2.75,-5.55) 20(-2.25,-5.55) 21(-1.75,-5.55) 22(-1.25,-5.55) 23(-0.75,-5.55) 24(-0.25,-5.55) 25(0.25,-5.55) 26(0.75,-5.55) 27(1.25,-5.55) 28(1.75,-5.55) 29(2.25,-5.55) 30(2.75,-5.55) 31(3.25,-5.55) 32(3.75,-5.55) 49(3.75,5.55) 50(3.25,5.55) 51(2.75,5.55) 52(2.25,5.55) 53(1.75,5.55) 54(1.25,5.55) 55(0.75,5.55) 56(0.25,5.55) 57(-0.25,5.55) 58(-0.75,5.55) 59(-1.25,5.55) 60(-1.75,5.55) 61(-2.25,5.55) 62(-2.75,5.55) 63(-3.25,5.55) 64(-3.75,5.55)
  silkscreen extent -5.67,-4.25 4.25,4.57, body extent -5,-5 5,5, height 1.6
MK20DX256VLH7 [mm] "Freescale ARM Cortex-M4"
  rect 1.6x0.3 smd mask+0.05: 1(0,0) 2(0,-0.5) 3(0,-1) 4(0,-1.5) 5(0,-2) 6(0,-2.5) 7(0,-3) 8(0,-3.5) 9(0,-4) 10(0,-4.5) 11(0,-5) 12(0,-5.5) 13(0,-6) 14(0,-6.5) 15(0,-7) 16(0,-7.5) 33(11,-7.5) 34(11,-7) 35(11,-6.5) 36(11,-6) 37(11,-5.5) 38(11,-5) 39(11,-4.5) 40(11,-4) 41(11,-3.5) 42(11,-3) 43(11,-2.5) 44(11,-2) 45(11,-1.5) 46(11,-1) 47(11,-0.5) 48(11,0)
  rect 0.3x1.6 smd mask+0.05: 17(1.75,-9.25) 18(2.25,-9.25) 19(2.75,-9.25) 20(3.25,-9.25) 21(3.75,-9.25) 22(4.25,-9.25) 23(4.75,-9.25) 24(5.25,-9.25) 25(5.75,-9.25) 26(6.25,-9.25) 27(6.75,-9.25) 28(7.25,-9.25) 29(7.75,-9.25) 30(8.25,-9.25) 31(8.75,-9.25) 32(9.25,-9.25) 49(9.25,1.75) 50(8.75,1.75) 51(8.25,1.75) 52(7.75,1.75) 53(7.25,1.75) 54(6.75,1.75) 55(6.25,1.75) 56(5.75,1.75) 57(5.25,1.75) 58(4.75,1.75) 59(4.25,1.75) 60(3.75,1.75) 61(3.25,1.75) 62(2.75,1.75) 63(2.25,1.75) 64(1.75,1.75)
  silkscreen extent 1.2,-8 9.8,0.5
SOIC-SN8_N [mm] "SOIC, 8-Leads, Body 4.9x3.8mm, Pitch 1.27mm, IPC Medium Density"
  oval 2.2x0.6 smd: 1(-2.4,1.905) 2(-2.4,0.635) 3(-2.4,-0.635) 4(-2.4,-1.905) 5(2.4,-1.905) 6(2.4,-0.635) 7(2.4,0.635) 8(2.4,1.905)
  silkscreen extent -2.52,-2.5 0.9,2.88, body extent -2,-2.5 2,2.5, height 1.75
SOT-23_N [mm] "SOT23, 3-Leads, Body 2.9x1.3mm, Pitch 0.95mm, Lead Span 2.5mm, IPC Medium Density"
  rect 1.15x0.6 smd: 1(-1.125,0.95) 2(-1.125,-0.95) 3(1.125,0)
  silkscreen extent -1.25,-1.5 0.7,1.92, body extent -0.7,-1.5 0.7,1.5, height 1.1
SOT-223-DB3_N [mm] "SOT223, 4-Leads, Body 6.5x3.5mm, Pitch 2.3mm, Lead Span 7mm, IPC Medium Density"
  rect 2.2x1 smd: 1(-3,2.3) 2(-3,0) 3(-3,-2.3)
  rect 2.2x3.3 smd: 4(3,0)
  silkscreen extent -3.12,-3.35 1.6,3.47, body extent -1.85,-3.35 1.85,3.35, height 1.8
TESTPT [mm] "Test Point"
  round 1 smd: 1(0,0)
VQG44_N [mm] "Thin QFP, 44-Leads, Body 10x10mm, Pitch 0.8mm, IPC Medium Density"
  oval 1.75x0.55 smd: 1(-5.65,4) 2(-5.65,3.2) 3(-5.65,2.4) 4(-5.65,1.6) 5(-5.65,0.8) 6(-5.65,0) 7(-5.65,-0.8) 8(-5.65,-1.6) 9(-5.65,-2.4) 10(-5.65,-3.2) 11(-5.65,-4) 23(5.65,-4) 24(5.65,-3.2) 25(5.65,-2.4) 26(5.65,-1.6) 27(5.65,-0.8) 28(5.65,0) 29(5.65,0.8) 30(5.65,1.6) 31(5.65,2.4) 32(5.65,3.2) 33(5.65,4)
  oval 0.55x1.75 smd: 12(-4,-5.65) 13(-3.2,-5.65) 14(-2.4,-5.65) 15(-1.6,-5.65) 16(-0.8,-5.65) 17(0,-5.65) 18(0.8,-5.65) 19(1.6,-5.65) 20(2.4,-5.65) 21(3.2,-5.65) 22(4,-5.65) 34(4,5.65) 35(3.2,5.65) 36(2.4,5.65) 37(1.6,5.65) 38(0.8,5.65) 39(0,5.65) 40(-0.8,5.65) 41(-1.6,5.65) 42(-2.4,5.65) 43(-3.2,5.65) 44(-4,5.65)
  silkscreen extent -5.77,-4.35 4.35,4.95, body extent -5,-5 5,5, height 1.2

## Part data
C101 C111 C112 C401 C402 C403 C404 C405 C406 C407 C408 C409 C410 C411 C412 C413 C414 C415 C416 C417 C418 C419 C420 C421 C422 C423 C424 C425 C426 C427 C501 C502 C503 C504 C505 C506 C507 C508 C509 C510 C511 C512 C513 C514 C515 C516 C517 C601 C602 C603 C604 C703 C704 C705 C706 C707 C708 C801 C802 C803 C804: library part "Cap Semi", "Capacitor (Semiconductor SIM Model)"
C102 C103 C104 C105 C106 C107 C108 C109 C110 C201 C202 C701 C702: "Capacitor (Semiconductor SIM Model)"
D101 D102 D103 D301 D302 D303 D703 D704: library part LED2, "Typical RED, GREEN, YELLOW, AMBER GaAs LED"
D701 D702: "Dual Common Cathode Schottky Diode"
F701 F702: library part "Fuse 2", "PTC Resettable Fuse"
J101: library part 500873-0806, "microSD Memory Card Connector"
J102 J701 J702: "54819-0572"
L101 L102 L501 L502: library part Inductor, "Inductor"
P101 P301: library part "Header 9X2", "Header, 9-Pin, Dual row"
P102: "Header, 7-Pin"
P103 P201 P202 P701: library part "Header 2", "Header, 2-Pin"
P104: library part "Header 4", "Header, 4-Pin"
P302 P501: library part "Header 6", "Header, 6-Pin"
P601: library part "Debug Interface", "10-pin Freescale Debug Interface"
P602 P605: library part "Header 3X2", "Header, 3-Pin, Dual row"
P603 P604: library part "Header 4X2", "Header, 4-Pin, Dual row"
P702: library part "Header 3", "Header, 3-Pin"
R101 R102 R103 R104 R105 R106 R107 R108 R109 R201 R202 R301 R302 R303 R401 R402 R403 R501 R502 R503 R504 R505 R506 R601 R602 R603 R604 R605 R606 R607 R608 R701 R702: "Resistor"
U101: "Freescale ARM Cortex-M4"
U201: "Spartan-6 LX 1.2V FPGA, 186 User I/Os, 256-Ball Fine-Pitch Thin BGA (1.0mm Pitch), Speed Grade 2, Commercial Grade, Pb-Free"
U501: "Dual High Speed USB To Multipurpose UART/FIFO IC, LQFP-64, Tape and Reel"
U502: "CoolRunner-II 1.8V, 32 Macrocell CPLD, 33 User I/Os, 44-Pin VQFP, Commercial Grade, Pb-Free"
U503: "1K, 64x16-bit, 2.5V Microwire Serial EEPROM, 8-Pin SOIC 150mil, Industrial Temperature"
U701 U702 U703: "1000 mA, Low Voltage, Low Quiescent Current LDO Regulator, 3-Pin SOT-223, Extended Temperature"
U801: "IDT 3.3V CMOS Static RAM 4 Meg (512K x 8-Bit)"
X101 X501: library part CTS405XTAL, "CTS 405 Surface Mount Quartz Crystal (405C35B12M00000)"
Y201 Y202: library part ASFLMB, "ASFLMB Clock Oscillator"

## Via types
v1: diameter 0.5, hole 0.3, Top Layer to Bottom Layer, 12 vias

## Nets (pads, with @x,y where several pads share a name; then routed paths per layer and width w, separated by ;. In a path a pad name is that pad's centre, name@x,y a point inside that pad or via, vN(x,y) a via of type N, cw(c..) or ccw(c..) an arc to the next point about the centre after c; other vN are vias at no path point)
1V2: C401.2 C402.2 C403.2 C404.2 C405.2 C406.2 C407.2 C708.2 TP703.1 U201.G7 U201.G9 U201.H8 U201.H10 U201.J7 U201.J9 U201.K8 U201.K10 U703.3
3V3: C101.1 C102.1 C103.2 C105.2 C108.2 C110.2 C201.2 C202.2 C408.2 C409.2 C410.2 C411.2 C412.2 C413.2 C414.2 C415.2 C416.2 C417.2 C418.2 C419.2 C420.2 C421.2 C422.2 C423.2 C424.2 C425.2 C426.2 C427.2 C515.2 C603.2 C706.2 C801.2 C802.2 C803.2 C804.2 D101.1 D102.1 D103.1 J101.4 L101.2 P101.1 P104.1 P201.1 P202.1 P301.1 P302.1 P601.1 R101.1 R102.1 R106.1 R401.2 R402.2 R403.2 R606.2 R607.2 R608.2 R702.1 TP702.1 U101.3 U101.21 U101.30 U101.48 U201.B4 U201.B9 U201.B13 U201.D2 U201.D7 U201.D10 U201.D15 U201.E5 U201.F8 U201.F11 U201.G4 U201.G10 U201.G13 U201.H6 U201.J2 U201.J10 U201.J15 U201.K4 U201.K13 U201.L6 U201.L9 U201.L11 U201.N2 U201.N7 U201.N10 U201.N15 U201.R4 U201.R8 U201.R13 U502.18 U502.26 U702.3 U801.VDD Y201.4 Y202.4 | length 6.4
  Top Layer w0.254: C802.2 C804.2 195.706,183.581 U801.VDD@197.104,183.581 ; U801.VDD@208.504,182.781 209.838,182.781 C803.2 C801.2
5V: C106.2 C705.2 C707.2 P702.2 U101.8 U702.1 U703.1
A5V: D702.3 P702.3
ARM_IO0: P101.3 U101.9
ARM_IO1: P101.5 U101.10
ARM_IO2: P101.7 U101.11
ARM_IO3: P101.9 U101.12
ARM_IO4: P101.11 U101.59
ARM_IO5: P101.13 U101.58
ARM_IO6: P101.15 U101.57
ARM_IO7: P101.17 U101.56
ARM_IO8: P101.4 U101.55
ARM_IO9: P101.6 U101.54
ARM_IO10: P101.8 U101.53
ARM_JTAG_TCK: P604.2 U101.22
ARM_JTAG_TDI: P604.6 U101.23
ARM_JTAG_TDO: U101.24
ARM_JTAG_TMS: P604.4 U101.25
ARM_MISO: J101.7 P102.2 R102.2 U101.52 U201.L4
ARM_MOSI: J101.2 P102.3 U101.51 U201.L5
ARM_NPCS0: J101.1 U101.49
ARM_NPCS1: U101.46 U201.E1
ARM_NPCS2: P102.5 U101.45
ARM_NPCS3: P102.6 U101.44
ARM_PROG_RESET: R101.2 U101.60 U201.K6
ARM_PROG_TCK: P602.1 U101.42
ARM_PROG_TDI: P602.5 U101.40
ARM_PROG_TDO: U101.43
ARM_PROG_TMS: P602.3 U101.41
ARM_RESET_N: P604.8 U101.34 U201.K5
ARM_SCL: P104.3 U101.35
ARM_SCLK: J101.5 P102.4 U101.50 U201.E2
ARM_SDA: P104.2 U101.36
ARM_UART0_CTS: U101.62
ARM_UART0_RTS: U101.61
ARM_UART0_RX: U101.63
ARM_UART0_TX: U101.64
FPGA_CLK_12: U201.K14 Y201.3
FPGA_CLK_100: U201.K12 Y202.3
FPGA_DONE: U201.P13
FPGA_JTAG_TCK: P602.2 P605.2 R403.1 U201.C14
FPGA_JTAG_TDI: P602.6 P605.6 R402.1 U201.C12
FPGA_JTAG_TDO: U201.E14
FPGA_JTAG_TMS: P602.4 P605.4 R401.1 U201.A15
FPGA_LED0: R301.1 U201.C3
FPGA_LED1: R302.1 U201.C2
FPGA_LED2: R303.1 U201.D3
FPGA_PROGRAM_B: U201.T2
FTDI_AC0: U501.26 U502.43 | length 9.8
  Top Layer w0.203: U501.26 336.75,175.25 v1(339,173)
  Bottom Layer w0.203: v1(339,173) 339.2,172.8 U502.43
FTDI_AC1: U501.27 U502.44 | length 9.9
  Top Layer w0.203: U501.27 337.25,175.75 v1(340,173)
  Bottom Layer w0.203: U502.44 v1(340,173)
FTDI_AC2: U501.28 U502.2 | length 14.1
  Top Layer w0.203: U501.28 337.75,175.963 340.504,173.209 340.504,170.004 v1(340,169.5)
  Bottom Layer w0.203: v1(340,169.5) 340,169 340.3,168.7 U502.2
FTDI_AC3: U501.29 U502.3 | length 15.4
  Top Layer w0.203: U501.29 338.25,176.75 v1(339,176)
  Bottom Layer w0.203: v1(339,176) 343.5,171.5 343.5,169 342.4,167.9 U502.3
FTDI_AC4: U501.30 U502.5 | length 17.5
  Top Layer w0.203: U501.30 338.75,177.75 v1(339.5,177)
  Bottom Layer w0.203: v1(339.5,177) 344,172.5 344,167.5 342.8,166.3 U502.5
FTDI_AC5: U501.32 U502.1 | length 14.1
  Top Layer w0.203: U501.32 341.05,179.95 344,177 344,174 v1(341.5,171.5)
  Bottom Layer w0.203: v1(341.5,171.5) 341.5,169.65 U502.1
FTDI_AC6: U501.33 U502.6
FTDI_AC7: U501.34 U502.8
FTDI_AD0: U501.16 U502.12
FTDI_AD1: U501.17 U502.13
FTDI_AD2: U501.18 U502.14
FTDI_AD3: U501.19 U502.16
FTDI_AD4: U501.21 U502.39 | length 9.5
  Top Layer w0.203: U501.21 334.25,173.75 v1(335,173)
  Bottom Layer w0.203: v1(335,173) 336,172 U502.39
FTDI_AD5: U501.22 U502.40 | length 9.6
  Top Layer w0.203: U501.22 334.75,174.25 v1(336,173)
  Bottom Layer w0.203: v1(336,173) 336.8,172.2 U502.40
FTDI_AD6: U501.23 U502.41 | length 9.8
  Top Layer w0.203: U501.23 335.25,174.75 v1(337,173)
  Bottom Layer w0.203: v1(337,173) 337.6,172.4 U502.41
FTDI_AD7: U501.24 U502.42 | length 9.9
  Top Layer w0.203: U501.24 335.75,175.25 v1(338,173)
  Bottom Layer w0.203: v1(338,173) 338.4,172.6 U502.42
FTDI_BD0: P501.1 U501.38 U502.11
FTDI_BD1: P501.2 U501.39 U502.9
FTDI_BD2: P501.3 U501.40 U502.24
FTDI_BD3: P501.4 U501.41 U502.10
FTDI_FLASH_CLK: R503.2 U501.62 U503.2
FTDI_FLASH_CS: R504.2 U501.63 U503.1
FTDI_FLASH_DATA: R506.2 U501.61 U503.3
FTDI_FLASH_DO: R505.2 R506.1 U503.4
FTDI_OSCI: C516.2 U501.2 X501.1
FTDI_OSCO: C517.2 U501.3 X501.3
FTDI_VPHY: C503.2 C504.2 L501.2 U501.4
FTDI_VPLL: C505.2 C506.2 L502.2 U501.9
GND: C101.2 C102.2 C103.1 C105.1 C106.1 C108.1 C110.1 C111.1 C112.1 C201.1 C202.1 C401.1 C402.1 C403.1 C404.1 C405.1 C406.1 C407.1 C408.1 C409.1 C410.1 C411.1 C412.1 C413.1 C414.1 C415.1 C416.1 C417.1 C418.1 C419.1 C420.1 C421.1 C422.1 C423.1 C424.1 C425.1 C426.1 C427.1 C501.1 C502.1 C503.1 C504.1 C505.1 C506.1 C507.1 C508.1 C509.1 C510.1 C511.1 C512.1 C513.1 C514.1 C515.1 C516.1 C517.1 C601.1 C602.1 C603.1 C604.1 C701.2 C702.2 C703.1 C704.1 C705.1 C706.1 C707.1 C708.1 C801.1 C802.1 C803.1 C804.1 D301.2 D302.2 D303.2 D703.2 D704.2 J101.6 J102.5 J701.5 J702.5 L102.1 P101.2 P102.7 P103.2 P104.4 P301.2 P302.6 P501.5 P601.3 P601.5 P601.9 P701.2 R201.2 R202.2 R502.2 U101.4 U101.31 U101.47 U201.A1 U201.A16 U201.B7 U201.B11 U201.D4 U201.D13 U201.E9 U201.G2 U201.G8 U201.G15 U201.H7 U201.H9 U201.H12 U201.J5 U201.J8 U201.K7 U201.K9 U201.L2 U201.L15 U201.M8 U201.N13 U201.P3 U201.P14 U201.R6 U201.R10 U201.T1 U201.T16 U501.1 U501.5 U501.11 U501.13 U501.15 U501.25 U501.35 U501.47 U501.51 U502.4 U502.17 U502.25 U503.5 U701.2 U701.4 U702.2 U702.4 U703.2 U703.4 U801.VSS Y201.2 Y202.2
GPS_RX: U101.1
GPS_TX: U101.2
J1V8: C501.2 C604.2 U501.49 U502.15
J3V3: C502.2 C507.2 C508.2 C509.2 C510.2 C511.2 C512.2 C513.2 C514.2 C601.2 C602.2 C704.2 L501.1 L502.1 P501.6 R501.2 R503.1 R504.1 R505.1 R701.1 TP701.1 U501.12 U501.20 U501.31 U501.37 U501.42 U501.50 U501.56 U501.64 U502.7 U502.35 U503.8 U701.3 | length 3.5
  Top Layer w0.203: U501.31 339.25,178.25 v1(340.5,177)
J5V: C703.2 D701.3 P702.1 U701.1
JTAG_DBGACK1: U502.29
JTAG_DBGRQ1: U502.30
JTAG_ON_TCK: P603.1 R602.1
JTAG_ON_TDI: P603.5 R604.1
JTAG_ON_TDO: R601.1
JTAG_ON_TMS: P603.3 R603.1
JTAG_ON_TRST: P603.7 R605.1
JTAG_RTCK1: U502.33
JTAG_TCK: P601.4 P603.2 P604.1 P605.1 R608.1
JTAG_TCK1: R602.2 U502.34
JTAG_TDI: P601.8 P603.6 P604.5 P605.5 R607.1
JTAG_TDI1: R604.2 U502.37
JTAG_TDO: P601.6
JTAG_TDO1: R601.2 U502.32
JTAG_TMS: P601.2 P603.4 P604.3 P605.3 R606.1
JTAG_TMS1: R603.2 U502.36
JTAG_TRST: P601.10 P603.8 P604.7
JTAG_TRST1: R605.2 U502.38
JTAG_TSRST1: U502.31
MOTOR_PWM0: P302.2 U201.D1
MOTOR_PWM1: P302.3 U201.C1
MOTOR_PWM2: P302.4 U201.B1
MOTOR_PWM3: P302.5 U201.G6
NetC104_1: C104.1 C107.1 C109.2 L102.2 U101.15 U101.16
NetC104_2: C104.2 L101.1 R105.1 U101.13
NetC107_2: C107.2 R105.2 U101.14
NetC109_1: C109.1 U101.17
NetC111_2: C111.2 U101.32 X101.3
NetC112_2: C112.2 U101.33 X101.1
NetC701_1: C701.1 F701.2 J701.1
NetC702_1: C702.1 F702.2 J702.1 P701.1
NetD101_2: D101.2 R107.2
NetD102_2: D102.2 R108.2
NetD103_2: D103.2 R109.2
NetD301_1: D301.1 R301.2
NetD302_1: D302.1 R302.2
NetD303_1: D303.1 R303.2
NetD701_1: D701.1 D701.2 F701.1
NetD702_1: D702.1 D702.2 F702.1
NetD703_1: D703.1 R701.2
NetD704_1: D704.1 R702.2
NetJ102_2: J102.2 R104.1 | length 2.3
  Top Layer w0.254: J102.2 369.239,42.075 R104.1
NetJ102_3: J102.3 R103.1 | length 2.2
  Top Layer w0.254: J102.3 369.328,41.275 R103.1
NetP103_1: P103.1 R106.2 U101.26
NetP201_2: P201.2 R201.1 Y201.1
NetP202_2: P202.2 R202.1 Y202.1
NetP301_3: P301.3 U201.R11
NetP301_4: P301.4 U201.T9
NetP301_5: P301.5 U201.T11
NetP301_6: P301.6 U201.R9
NetP301_7: P301.7 U201.M12
NetP301_8: P301.8 U201.M10
NetP301_9: P301.9 U201.M11
NetP301_10: P301.10 U201.L10
NetP301_11: P301.11 U201.P10
NetP301_12: P301.12 U201.P9
NetP301_13: P301.13 U201.T10
NetP301_14: P301.14 U201.N9
NetP301_15: P301.15 U201.N12
NetP301_16: P301.16 U201.P11
NetP301_17: P301.17 U201.P12
NetP301_18: P301.18 U201.N11
NetR103_2: R103.2 U101.5
NetR104_2: R104.2 U101.6
NetR107_1: R107.1 U101.39
NetR108_1: R108.1 U101.38
NetR109_1: R109.1 U101.37
NetR501_1: R501.1 U501.14
NetR502_1: R502.1 U501.6
SRAM_ADDR0: U201.M4 U801.A0
SRAM_ADDR1: U201.M3 U801.A1
SRAM_ADDR2: U201.M5 U801.A2
SRAM_ADDR3: U201.N4 U801.A3
SRAM_ADDR4: U201.R2 U801.A4
SRAM_ADDR5: U201.R1 U801.A5
SRAM_ADDR6: U201.P2 U801.A6
SRAM_ADDR7: U201.P1 U801.A7
SRAM_ADDR8: U201.N3 U801.A8
SRAM_ADDR9: U201.N1 U801.A9
SRAM_ADDR10: U201.M2 U801.A10
SRAM_ADDR11: U201.M1 U801.A11
SRAM_ADDR12: U201.L3 U801.A12
SRAM_ADDR13: U201.L1 U801.A13
SRAM_ADDR14: U201.K2 U801.A14
SRAM_ADDR15: U201.K1 U801.A15
SRAM_ADDR16: U201.J3 U801.A16
SRAM_ADDR17: U201.J1 U801.A17
SRAM_ADDR18: U201.H2 U801.A18
SRAM_CS: U201.G3 U801.CS
SRAM_DATA0: U201.F2 U801.D0
SRAM_DATA1: U201.F1 U801.D1
SRAM_DATA2: U201.K3 U801.D2
SRAM_DATA3: U201.J4 U801.D3
SRAM_DATA4: U201.J6 U801.D4
SRAM_DATA5: U201.H5 U801.D5
SRAM_DATA6: U201.H4 U801.D6
SRAM_DATA7: U201.H3 U801.D7
SRAM_OE: U201.H1 U801.OE
SRAM_WE: U201.G1 U801.WE
USB_DM: J701.2 U501.7
USB_DP: J701.3 U501.8
VCC: P102.1
pads on no net: J101.8 J101.9 J102.1 J102.4 J102.6 J701.4 J701.6 J702.2 J702.3 J702.4 J702.6 P101.10 P101.12 P101.14 P101.16 P101.18 P601.7 U101.7 U101.18 U101.19 U101.20 U101.27 U101.28 U101.29 U201.A2 U201.A3 U201.A4 U201.A5 U201.A6 U201.A7 U201.A8 U201.A9 U201.A10 U201.A11 U201.A12 U201.A13 U201.A14 U201.B2 U201.B3 U201.B5 U201.B6 U201.B8 U201.B10 U201.B12 U201.B14 U201.B15 U201.B16 U201.C4 U201.C5 U201.C6 U201.C7 U201.C8 U201.C9 U201.C10 U201.C11 U201.C13 U201.C15 U201.C16 U201.D5 U201.D6 U201.D8 U201.D9 U201.D11 U201.D12 U201.D14 U201.D16 U201.E3 U201.E4 U201.E6 U201.E7 U201.E8 U201.E10 U201.E11 U201.E12 U201.E13 U201.E15 U201.E16 U201.F3 U201.F4 U201.F5 U201.F6 U201.F7 U201.F9 U201.F10 U201.F12 U201.F13 U201.F14 U201.F15 U201.F16 U201.G5 U201.G11 U201.G12 U201.G14 U201.G16 U201.H11 U201.H13 U201.H14 U201.H15 U201.H16 U201.J11 U201.J12 U201.J13 U201.J14 U201.J16 U201.K11 U201.K15 U201.K16 U201.L7 U201.L8 U201.L12 U201.L13 U201.L14 U201.L16 U201.M6 U201.M7 U201.M9 U201.M13 U201.M14 U201.M15 U201.M16 U201.N5 U201.N6 U201.N8 U201.N14 U201.N16 U201.P4 U201.P5 U201.P6 U201.P7 U201.P8 U201.P15 U201.P16 U201.R3 U201.R5 U201.R7 U201.R12 U201.R14 U201.R15 U201.R16 U201.T3 U201.T4 U201.T5 U201.T6 U201.T7 U201.T8 U201.T12 U201.T13 U201.T14 U201.T15 U501.10 U501.36 U501.43 U501.44 U501.45 U501.46 U501.48 U501.52 U501.53 U501.54 U501.55 U501.57 U501.58 U501.59 U501.60 U502.19 U502.20 U502.21 U502.22 U502.23 U502.27 U502.28 U503.6 U503.7 U801.NC X101.2 X101.4 X501.2 X501.4
copper on no net:
  other v1: 239.999,74.199

## Polygon pours and split planes (outlines as drawn)
no net on Internal Plane 1 (split plane): 177.29,25.91 25.91,25.91 25.91,126.49 177.29,126.49
no net on Internal Plane 2 (split plane): 177.29,25.91 25.91,25.91 25.91,126.49 177.29,126.49

## Text inside footprints (layer, text, board x,y; h text height)
J102: Top Overlay "USB" at 365.188,39.275 h1.52 r90
J701: Top Overlay "USB" at 320.5,183.5 h1.52 r90
J702: Top Overlay "USB" at 252.444,164.02 h1.52 r180
P101: Top Overlay "18" at 418.719,52.705 h1.27 r90; Top Overlay "17" at 421.259,52.705 h1.27 r90; Top Overlay "1" at 421.259,27.813 h1.27 r90; Top Overlay "2" at 418.719,27.305 h1.27 r90
P301: Top Overlay "18" at 231.521,107.823 h1.27 r90; Top Overlay "17" at 234.061,107.823 h1.27 r90; Top Overlay "1" at 234.061,82.931 h1.27 r90; Top Overlay "2" at 231.521,82.423 h1.27 r90
P601: Top Overlay "RESET" at 325.12,86.995 h0.95 r90; Top Overlay "TDI" at 322.58,86.995 h0.95 r90; Top Overlay "TDO" at 320.04,86.995 h0.95 r90; Top Overlay "TCK" at 317.5,86.995 h0.95 r90; Top Overlay "TMS" at 314.96,86.995 h0.95 r90; Top Overlay "Vdd" at 314.96,78.295 h0.95 r90; Top Overlay "Vss" at 317.5,78.295 h0.95 r90; Top Overlay "Vss" at 320.04,78.295 h0.95 r90; Top Overlay "NC" at 322.58,79.247 h0.95 r90; Top Overlay "GND" at 325.12,78.295 h0.95 r90
P602: Top Overlay "6" at 224.155,152.781 h1.27 r90; Top Overlay "5" at 226.695,152.781 h1.27 r90; Top Overlay "2" at 224.155,143.637 h1.27 r90; Top Overlay "1" at 226.695,144.145 h1.27 r90
P603: Top Overlay "2" at 282.575,141.097 h1.27 r90; Top Overlay "1" at 285.115,141.605 h1.27 r90; Top Overlay "7" at 285.115,152.781 h1.27 r90; Top Overlay "8" at 282.575,152.781 h1.27 r90
P604: Top Overlay "2" at 275.209,141.097 h1.27 r90; Top Overlay "1" at 277.749,141.605 h1.27 r90; Top Overlay "7" at 277.749,152.781 h1.27 r90; Top Overlay "8" at 275.209,152.781 h1.27 r90
P605: Top Overlay "6" at 253.619,152.781 h1.27 r90; Top Overlay "5" at 256.159,152.781 h1.27 r90; Top Overlay "2" at 253.619,143.637 h1.27 r90; Top Overlay "1" at 256.159,144.145 h1.27 r90